# Altium PCB SensorPCBA_v0.2.PcbDoc
Units mm, origin at the board's own origin, x right, y up, seen from the top; angles counter-clockwise.
Board outline 22.8 x 26.3 mm, 2 copper layers (Top Layer, Bottom Layer); 33 components, 33 nets, 194 pads, 0 vias.
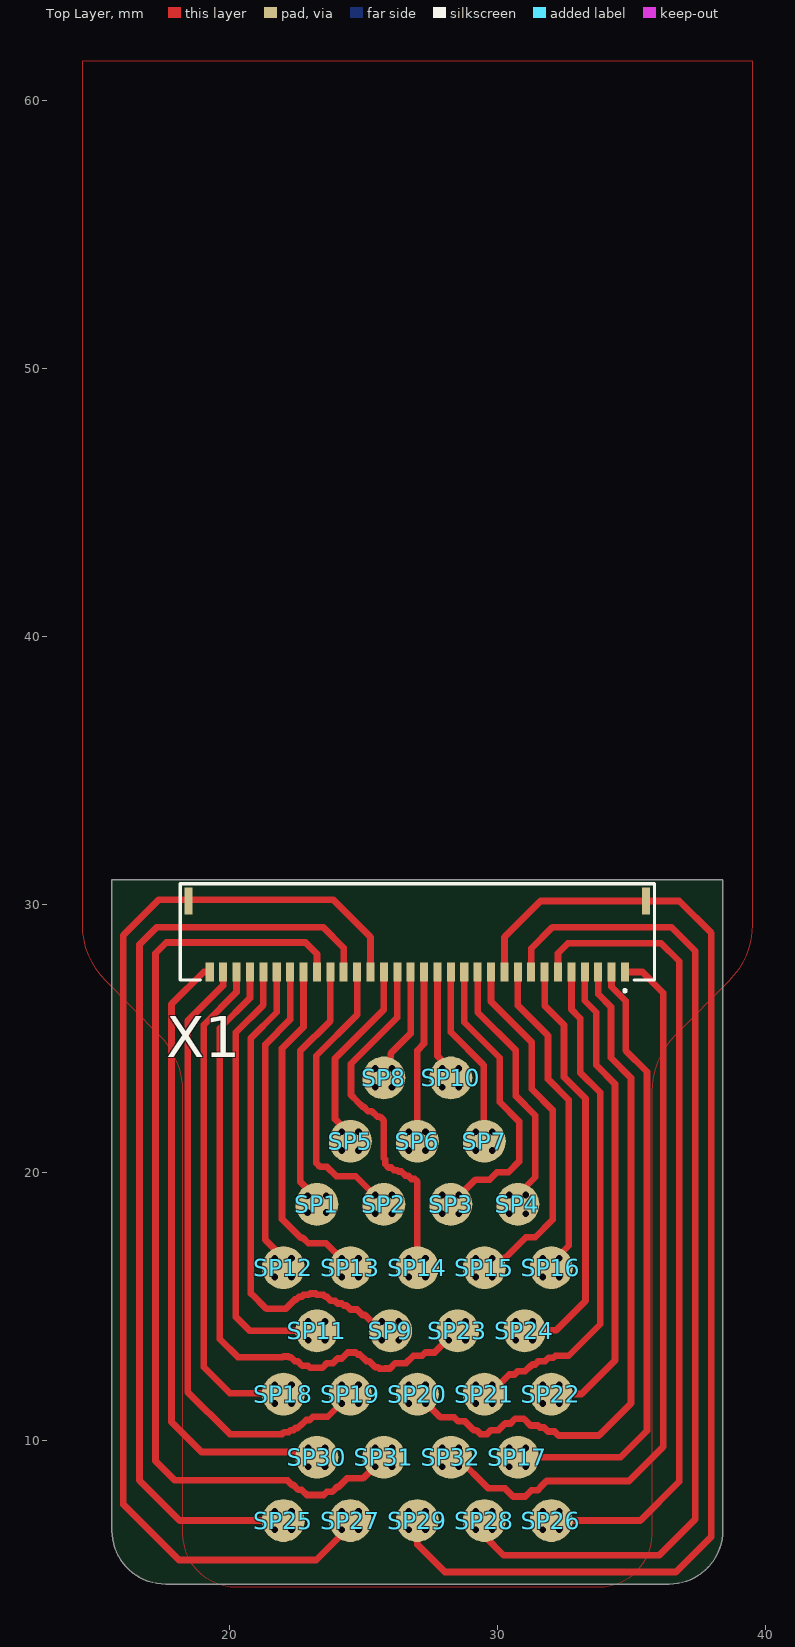
[diagram p0: Top Layer view]
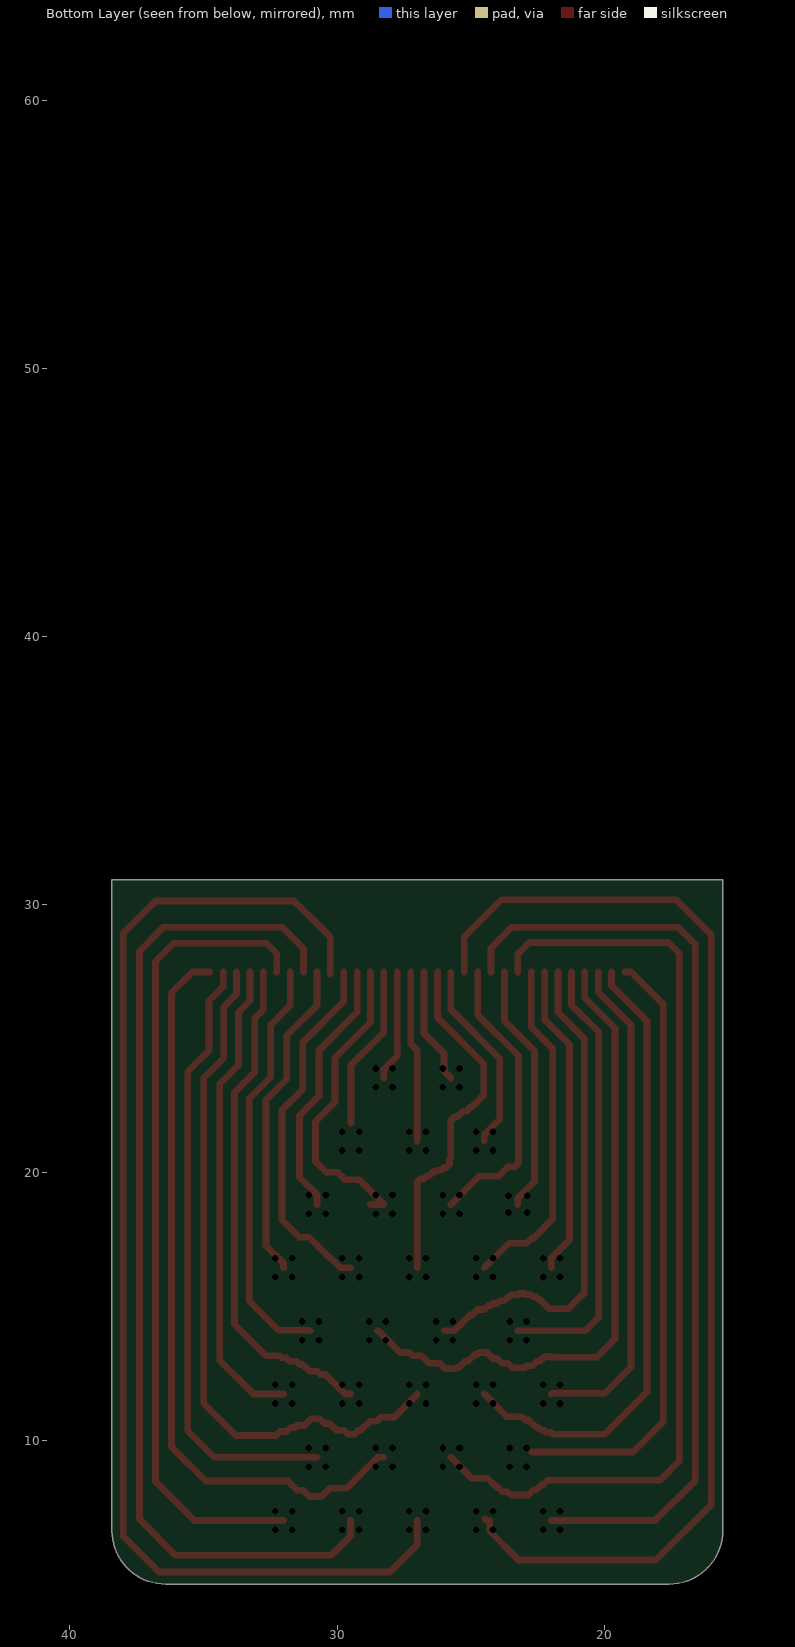
[diagram p1: Bottom Layer view, seen from below]

## Layer stack, top to bottom
Top Solder: solder mask 0.0102, Solder Resist, Dk 3.5
Top Layer: signal copper 0.0356
Dielectric 1: dielectric 0.32, FR-4, Dk 4.8
Bottom Layer: signal copper 0.0356
Bottom Solder: solder mask 0.0102, Solder Resist, Dk 3.5

## Board outline
15.6,6.625 ccw(c17.6,6.625) 17.6,4.625 36.4,4.625 ccw(c36.4,6.625) 38.4,6.625 38.4,30.925 15.6,30.925

## Design rules (kind name [scope] priority, off if disabled: settings)
Clearance Clearance_SP [(InComponent('SP1') OR InComponent('SP2') OR InComponent('SP3') OR InComponent('SP4') OR InComponent('SP5') OR InComponent('SP6') OR InComponent('SP7') OR InComponent('SP8') OR InComponent('SP9') OR InComponent('SP10') OR InComponent('SP11') OR InComponent('SP12') OR InComponent('SP13') OR InComponent('SP14') OR InComponent('SP15') OR InComponent('SP16') OR InComponent('SP17') OR InComponent('SP18') OR InComponent('SP19') OR InComponent('SP20') OR InComponent('SP21') OR InComponent('SP22') OR InComponent('SP23') OR InComponent('SP24') OR InComponent('SP25') OR InComponent('SP26') OR InComponent('SP27') OR InComponent('SP28') OR InComponent('SP29') OR InComponent('SP30') OR InComponent('SP31') OR InComponent('SP32'))] p1: gap=0.5 ignorepadtopadclearanceinfootprint=FALSE
Clearance [All] p2: gap=0.3 ignorepadtopadclearanceinfootprint=FALSE except(0: Arc-Hole Track-Hole SMDPad-Hole THPad-Hole Via-Hole Fill-Hole Poly-Hole Region-Hole Text-Hole)
ComponentClearance [All] p1: gap=0 collisioncheckmode=3 verticalgap=0 showdistances=FALSE
HoleToHoleClearance [All] p1: gap=0.15 allowstackedmicrovias=TRUE
MinimumSolderMaskSliver [All] p1: minsoldermaskwidth=0.15
PolygonConnect [All] p1: connectstyle=Relief reliefconductorwidth=0.254 reliefentries=4 polygonreliefangle="90 Angle" airgapwidth=0.254
RoutingVias [All] p1: holewidth=0.711 width=1.27 viastyle="Through Hole" minholewidth=0.25 minwidth=0.15 maxholewidth=0.711 maxwidth=1.27
ShortCircuit [All] p1: allowed=TRUE
SolderMaskExpansion [All] p1: expansion=0.102 istentingtop=FALSE
Width [All] p1: maxlimit=4 minlimit=0.1 preferedwidth=0.3 minimp=50.000000 maximp=50.000000 favimp=50.000000
26 further rules are at their usual default settings.

## Components (designator, comment, footprint, x,y, rotation, side; value= is the part's Value field where it differs from the comment)
SP1 "SensorPAD" Pump_via 23.25,18.8 r0 top
SP2 "SensorPAD" Pump_via 25.75,18.8 r90 top
SP3 "SensorPAD" Pump_via 28.25,18.8 r90 top
SP4 "SensorPAD" Pump_via 30.75,18.8 r90 top
SP5 "SensorPAD" Pump_via 24.5,21.16 r90 top
SP6 "SensorPAD" Pump_via 27,21.16 r90 top
SP7 "SensorPAD" Pump_via 29.5,21.16 r90 top
SP8 "SensorPAD" Pump_via 25.75,23.52 r90 top
SP9 "SensorPAD" Pump_via 26,14.08 r90 top
SP10 "SensorPAD" Pump_via 28.25,23.52 r90 top
SP11 "SensorPAD" Pump_via 23.25,14.08 r90 top
SP12 "SensorPAD" Pump_via 22,16.44 r90 top
SP13 "SensorPAD" Pump_via 24.5,16.44 r90 top
SP14 "SensorPAD" Pump_via 27,16.44 r90 top
SP15 "SensorPAD" Pump_via 29.5,16.44 r90 top
SP16 "SensorPAD" Pump_via 32,16.44 r90 top
SP17 "SensorPAD" Pump_via 30.75,9.36 r90 top
SP18 "SensorPAD" Pump_via 22,11.72 r90 top
SP19 "SensorPAD" Pump_via 24.5,11.72 r90 top
SP20 "SensorPAD" Pump_via 27,11.72 r90 top
SP21 "SensorPAD" Pump_via 29.5,11.72 r90 top
SP22 "SensorPAD" Pump_via 32,11.72 r90 top
SP23 "SensorPAD" Pump_via 28.5,14.08 r90 top
SP24 "SensorPAD" Pump_via 31,14.08 r90 top
SP25 "SensorPAD" Pump_via 22,7 r90 top
SP26 "SensorPAD" Pump_via 32,7 r90 top
SP27 "SensorPAD" Pump_via 24.5,7 r90 top
SP28 "SensorPAD" Pump_via 29.5,7 r90 top
SP29 "SensorPAD" Pump_via 27,7 r90 top
SP30 "SensorPAD" Pump_via 23.25,9.36 r90 top
SP31 "SensorPAD" Pump_via 25.75,9.36 r90 top
SP32 "SensorPAD" Pump_via 28.25,9.36 r90 top
X1 "503480-3200" MOLEX_503480-3200 27,29.275 r180 top

## Footprints (in the part's own frame and the unit in brackets; to place one, negate y for a bottom-side part, rotate by r counter-clockwise, add the part's x,y. Pads: shape width x height; smd on the part's side, far side on the other; paste and mask are expansions set on the pad)
MOLEX_503480-3200 [mm]
  rect 0.3x0.7 smd paste+0 mask+0.102: 1(-7.75,1.8) 2(-7.25,1.8) 3(-6.75,1.8) 4(-6.25,1.8) 5(-5.75,1.8) 6(-5.25,1.8) 7(-4.75,1.8) 8(-4.25,1.8) 9(-3.75,1.8) 10(-3.25,1.8) 11(-2.75,1.8) 12(-2.25,1.8) 13(-1.75,1.8) 14(-1.25,1.8) 15(-0.75,1.8) 16(-0.25,1.8) 17(0.25,1.8) 18(0.75,1.8) 19(1.25,1.8) 20(1.75,1.8) 21(2.25,1.8) 22(2.75,1.8) 23(3.25,1.8) 24(3.75,1.8) 25(4.25,1.8) 26(4.75,1.8) 27(5.25,1.8) 28(5.75,1.8) 29(6.25,1.8) 30(6.75,1.8) 31(7.25,1.8) 32(7.75,1.8)
  rect 0.3x1 smd paste+0 mask+0.102: SH1(-8.54,-0.85) SH2(8.54,-0.85)
  silkscreen extent -8.85,-1.5 8.85,2.55, body extent -8.85,-1.45 8.85,2.15, height 1.85
Pump_via [mm]
  round 1.6 smd mask+0.15: 1(0,0)
  round 0 hole 0.25 unplated mask+0.09: ""(-0.35,-0.3) ""(-0.35,0.325) ""(0.35,-0.3) ""(0.35,0.325)

## Part data
X1: "32 Position FFC, FPC Connector Contacts, Top and Bottom 0.020 (0.50mm) Surface Mount, Right Angle", Package=None, Check_prices=https://www.snapeda.com/parts/5034803200/Molex/view-part/?ref=eda, MF=Molex, MP=5034803200, SnapEDA_Link=https://www.snapeda.com/parts/5034803200/Molex/view-part/?ref=snap

## Nets (pads, with @x,y where several pads share a name; then routed paths per layer and width w, separated by ;. In a path a pad name is that pad's centre, name@x,y a point inside that pad or via, vN(x,y) a via of type N, cw(c..) or ccw(c..) an arc to the next point about the centre after c; other vN are vias at no path point)
HV1: SP1.1 X1.23 | length 9.4
  Top Layer w0.25: SP1.1 23.25,19.033 22.625,19.658 22.625,24.525 23.75,25.65 X1.23
HV2: SP2.1 X1.21 | length 10.9
  Top Layer w0.25: X1.21 24.75,25.875 23.225,24.35 23.225,20.346 23.371,20.2 23.625,20.2 23.975,19.85 24.7,19.85 SP2.1
HV3: SP3.1 X1.13 | length 11.7
  Top Layer w0.25: SP3.1@28.75,18.8 SP3.1 29.175,19.725 29.7,19.725 29.975,20 30.4,20 30.8,20.4 30.8,21.9 30.075,22.625 30.075,24.275 28.75,25.6 28.75,26.05 ; 28.75,26.025 28.75,26.825 X1.13
HV4: SP4.1 X1.12 | length 9.8
  Top Layer w0.25: X1.12 29.25,26.825 29.25,25.975 30.675,24.55 30.675,22.85 31.4,22.125 31.4,19.813 30.75,19.163 SP4.1
HV5: SP5.1 X1.19 | length 7.3
  Top Layer w0.25: SP5.1 24.5,21.406 23.925,21.981 23.925,24.25 25.75,26.075 X1.19@25.75,27.454
HV6: SP6.1 X1.16 | length 6.4
  Top Layer w0.25: SP6.1 27,24.55 27.25,24.8 27.25,26.825 X1.16
HV7: SP7.1 X1.14 | length 6.1
  Top Layer w0.25: X1.14 28.25,26.825 28.25,25.225 29.475,24 SP7.1@29.475,21.833
HV8: SP8.1 X1.17 | length 4.4
  Top Layer w0.25: SP8.1 26.003,23.773 26.003,24.428 26.75,25.175 X1.17
HV9: SP9.1 X1.27 | length 18.7
  Top Layer w0.25: 20.775,15.475 20.775,25 21.75,25.975 X1.27 ; 20.8,15.475 21.375,14.9 22.075,14.9 22.425,15.25 22.475,15.25 22.575,15.35 22.675,15.35 22.75,15.425 22.95,15.425 22.996,15.471 23.204,15.471 23.25,15.425 23.5,15.425 23.575,15.35 23.625,15.35 23.775,15.2 23.925,15.2 24.025,15.1 24.175,15.1 24.25,15.025 24.35,15.025 24.5,14.875 24.75,14.875 24.95,14.675 25.04,14.675 25.635,14.08 SP9.1
HV10: SP10.1 X1.15 | length 4.2
  Top Layer w0.25: X1.15 27.75,26.825 27.75,24.341 28.25,23.841 SP10.1
HV11: SP11.1 X1.28 | length 16.5
  Top Layer w0.25: X1.28 21.25,26.25 20.225,25.225 20.225,14.6 20.745,14.08 SP11.1
HV12: SP12.1 X1.26 | length 11.7
  Top Layer w0.25: SP12.1 22,16.803 21.325,17.478 21.325,24.775 22.25,25.7 X1.26
HV13: SP13.1 X1.25 | length 12.9
  Top Layer w0.25: X1.25 22.75,25.425 21.95,24.625 21.95,18.25 22.65,17.55 22.725,17.55 22.925,17.35 23.59,17.35 SP13.1
HV14: SP14.1 X1.18 | length 13.3
  Top Layer w0.25: X1.18 26.25,25.775 24.525,24.05 24.525,22.883 24.775,22.633 24.775,22.625 24.95,22.45 24.992,22.45 25.167,22.275 25.3,22.275 25.5,22.075 25.6,22.075 25.75,21.925 25.75,20.525 25.8,20.475 25.8,20.3 25.925,20.175 26.025,20.175 26.125,20.075 26.25,20.075 26.3,20.025 26.4,20.025 26.55,19.875 26.65,19.875 26.775,19.75 26.9,19.75 27,19.65 SP14.1
HV15: SP15.1 X1.11 | length 13.5
  Top Layer w0.25: SP15.1 29.879,16.44 30.249,16.81 30.285,16.81 31.05,17.575 31.4,17.575 32.05,18.225 32.05,22.325 31.275,23.1 31.275,24.85 29.75,26.375 29.75,26.825 X1.11
HV16: SP16.1 X1.9 | length 12.3
  Top Layer w0.25: 30.75,26.72 X1.9 ; 30.75,26.925 30.75,26.35 30.75,26.225 31.875,25.1 31.875,23.475 32.65,22.7 32.65,17.258 32,16.608 SP16.1
HV17: SP17.1 X1.2 | length 22.9
  Top Layer w0.25: SP17.1 34.585,9.36 35.575,10.35 35.575,23.75 34.775,24.55 34.775,26.4 34.25,26.925 X1.2
HV18: SP18.1 X1.30 | length 18.6
  Top Layer w0.25: X1.30 20.25,26.725 19.025,25.5 19.025,12.725 20,11.75 21.97,11.75 SP18.1
HV19: SP19.1 X1.31 | length 23.6
  Top Layer w0.25: X1.31 19.75,26.975 18.425,25.65 18.425,11.8 20,10.225 21.95,10.225 22.025,10.3 22.2,10.3 22.275,10.375 22.375,10.375 22.45,10.45 22.525,10.45 22.65,10.575 22.675,10.575 22.85,10.75 22.975,10.75 23.1,10.875 23.655,10.875 SP19.1
HV20: SP20.1 X1.3 | length 26.2
  Top Layer w0.25: SP20.1 27.87,10.85 28.375,10.85 28.525,10.7 28.775,10.7 29.1,10.375 29.2,10.375 29.35,10.225 29.6,10.225 29.75,10.375 30.025,10.375 30.275,10.625 30.475,10.625 30.65,10.8 30.975,10.8 31.225,10.55 31.5,10.55 31.575,10.475 31.725,10.475 31.875,10.325 32.125,10.325 32.275,10.175 33.775,10.175 34.975,11.375 34.975,23.525 34.225,24.275 34.225,26.175 33.75,26.65 X1.3
HV21: SP21.1 X1.5 | length 19.1
  Top Layer w0.25: SP21.1 29.702,11.72 30.432,12.45 30.625,12.45 30.75,12.575 31.025,12.575 31.2,12.75 31.225,12.75 31.3,12.825 31.4,12.825 31.525,12.95 31.775,12.95 31.9,13.075 32.075,13.075 32.15,13.15 32.65,13.15 33.825,14.325 33.825,17.6 ; X1.5 32.75,26.075 33.075,25.75 33.075,23.725 33.825,22.975 33.825,22.8 33.825,17.5
HV22: SP22.1 X1.4 | length 17.9
  Top Layer w0.25: SP22.1 33.12,11.72 34.375,12.975 34.375,23.3 33.675,24 33.675,25.975 33.25,26.4 X1.4
HV23: SP23.1 X1.29 | length 24.6
  Top Layer w0.25: X1.29 20.75,26.5 19.625,25.375 19.625,13.775 20.3,13.1 21.975,13.1 22,13.125 22.175,13.125 22.2,13.1 22.271,13.1 22.421,12.95 22.525,12.95 22.7,12.775 22.925,12.775 23,12.7 23.45,12.7 23.625,12.875 23.85,12.875 24.025,13.05 24.175,13.05 24.4,13.275 24.7,13.275 24.775,13.2 24.85,13.2 25.1,12.95 25.2,12.95 25.425,12.725 25.525,12.725 25.584,12.666 25.791,12.666 25.8,12.675 25.975,12.675 26.175,12.875 26.575,12.875 26.85,13.15 27.175,13.15 27.3,13.275 27.643,13.275 28.448,14.08 SP23.1
HV24: SP24.1 X1.7 | length 15.7
  Top Layer w0.25: SP24.1 31.02,14.1 32.175,14.1 33.275,15.2 33.275,15.725 ; X1.7 31.75,26.225 32.475,25.5 32.475,23.55 33.275,22.75 33.275,15.625
HV25: SP25.1 X1.22 | length 35.1
  Top Layer w0.25: SP25.1 18.125,7 16.625,8.5 16.625,28.5 17.275,29.15 23.475,29.15 24.25,28.375 X1.22
HV26: SP26.1 X1.6 | length 30.5
  Top Layer w0.25: SP26.1 35.325,7 36.775,8.45 36.775,27.875 36.1,28.55 32.625,28.55 32.25,28.175 X1.6
HV27: SP27.1 X1.20 | length 43.1
  Top Layer w0.25: SP27.1@24.3,7 24.3,6.6 23.225,5.525 18.1,5.525 16.025,7.6 16.025,28.85 17.35,30.175 23.85,30.175 25.25,28.775 X1.20 ; SP27.1@24.356,6.944 SP27.1@24.475,7.063
HV28: SP28.1 X1.8 | length 38.2
  Top Layer w0.25: SP28.1 29.5,6.425 30.225,5.7 36.025,5.7 37.375,7.05 37.375,28.25 36.475,29.15 32.05,29.15 31.25,28.35 X1.8
HV29: SP29.1 X1.10 X1.SH1 | length 45.5
  Top Layer w0.25: SP29.1 27,6.1 28.025,5.075 36.65,5.075 37.975,6.4 37.975,28.925 36.775,30.125 X1.SH1 31.6,30.125 30.25,28.775 X1.10@30.25,27.401
HV30: SP30.1 X1.32 | length 23
  Top Layer w0.25: 17.825,10.7 17.825,26.275 19.025,27.475 X1.32 ; 17.825,10.775 17.825,10.675 18.94,9.56 SP30.1@22.726,9.56
HV31: SP31.1 X1.24 | length 35.6
  Top Layer w0.25: X1.24 23.25,28.15 22.825,28.575 17.625,28.575 17.225,28.175 17.225,9.225 17.95,8.5 22.15,8.5 22.325,8.325 22.375,8.325 22.55,8.15 22.675,8.15 22.875,7.95 23.5,7.95 23.625,8.075 23.825,8.075 24,8.25 24.05,8.25 24.375,8.575 24.965,8.575 SP31.1
HV32: SP32.1 X1.1 | length 28
  Top Layer w0.25: SP32.1 28.49,9.36 29.65,8.2 30.275,8.2 30.575,7.9 31.025,7.9 31.25,8.125 31.483,8.125 31.6,8.242 31.6,8.25 31.825,8.475 34.9,8.475 36.175,9.75 36.175,26.7 35.4,27.475 X1.1
NetLabel35: X1.SH2
pads on no net: SP1. SP2. SP3. SP4. SP5. SP6. SP7. SP8. SP9. SP10. SP11. SP12. SP13. SP14. SP15. SP16. SP17. SP18. SP19. SP20. SP21. SP22. SP23. SP24. SP25. SP26. SP27. SP28. SP29. SP30. SP31. SP32.

## Polygon pours and split planes (outlines as drawn)
no net on Top Layer "NONET_L01_P001" (solid, shelved, pour order 1): 18.25,23 ccw(c15.25,23) 17.371,25.121 15.379,27.129 cw(c17.5,29.25) 14.5,29.25 14.5,61.5 39.5,61.5 39.5,29.25 cw(c36.5,29.25) 38.621,27.129 36.629,25.121 ccw(c38.75,23) 35.75,23 35.75,6.5 cw(c33.75,6.5) 33.75,4.5 20.25,4.5 cw(c20.25,6.5) 18.25,6.5

## Silkscreen, mask and mechanical layers (free items; w line width, h text height)
Mechanical 1:
  lines w0.15: 15.6,6.6 15.6,30.925 25.825,30.925 38.4,30.925 38.4,6.625 cw(c36.4,6.625) 36.4,4.625 17.6,4.625 cw(c17.6,6.625) 15.6,6.625